# Altium PCB TNY276PN_5V_800mA_SMPS.PcbDoc
Units mil, origin at the board's own origin, x right, y up, seen from the top; angles counter-clockwise.
Board outline 2400 x 1550 mil, 2 copper layers (Top Layer, Bottom Layer); 26 components, 17 nets, 68 pads, 0 vias.
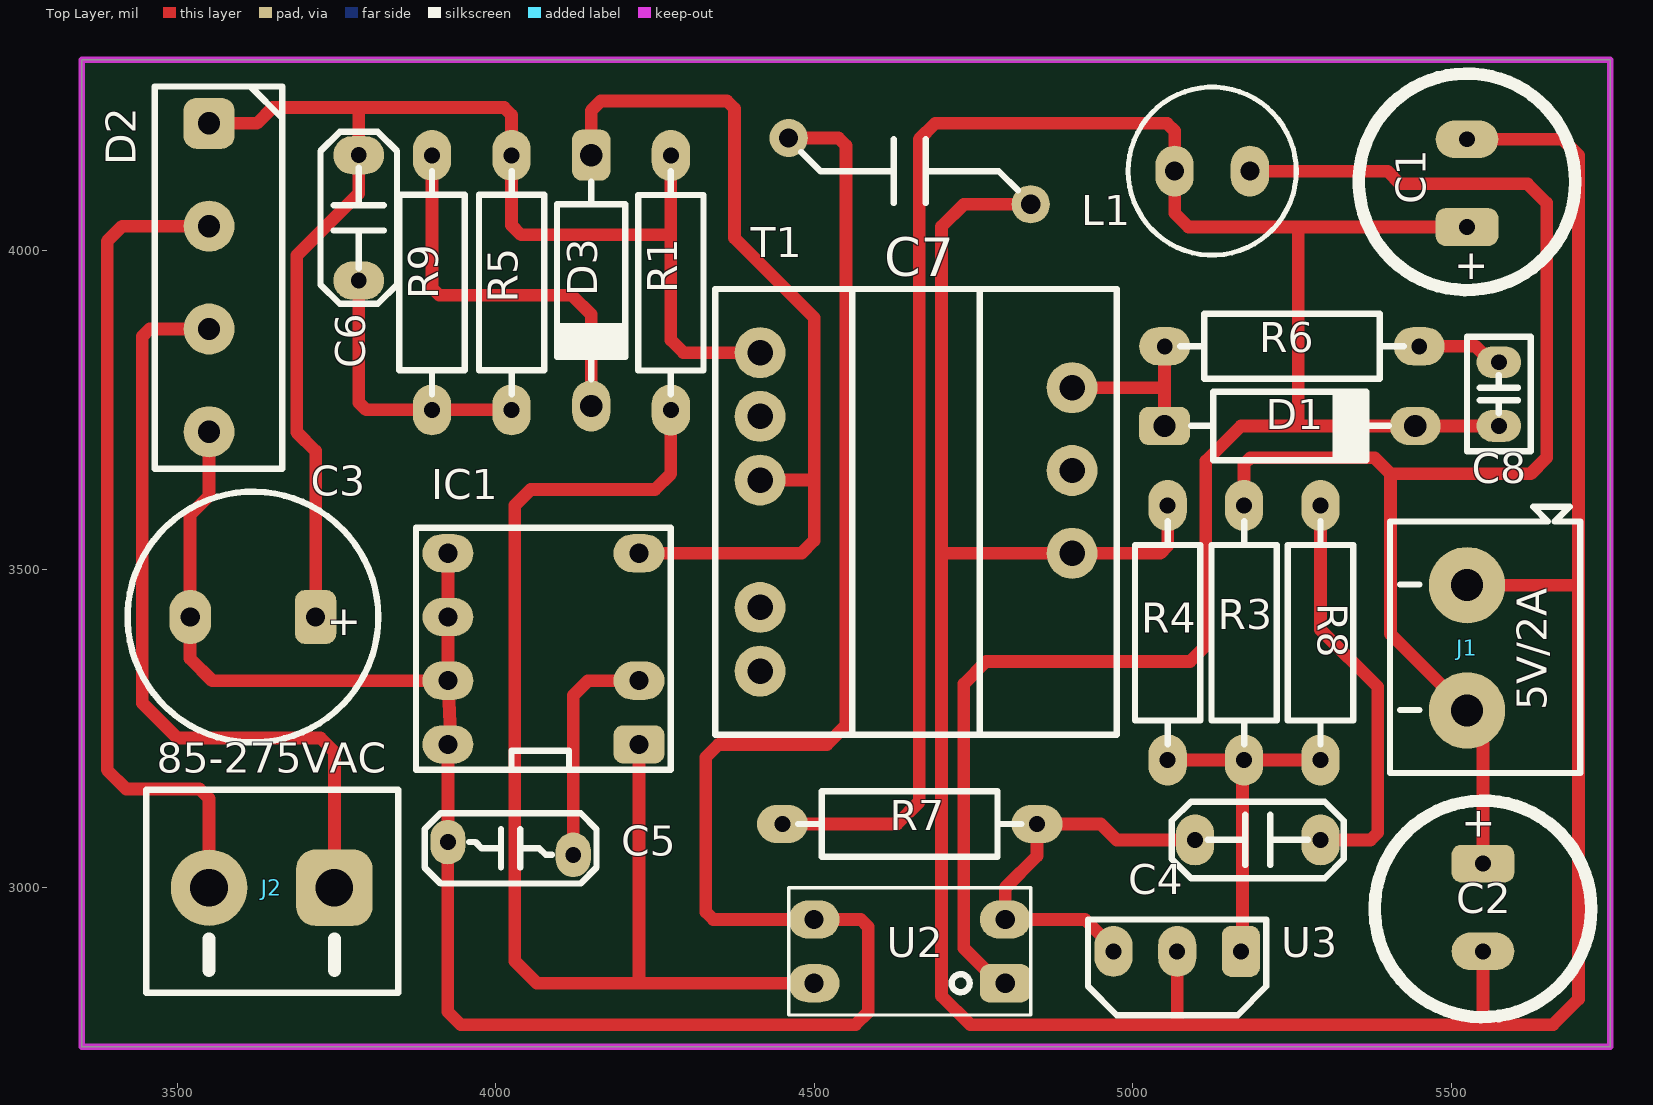
[diagram p0: Top Layer view]
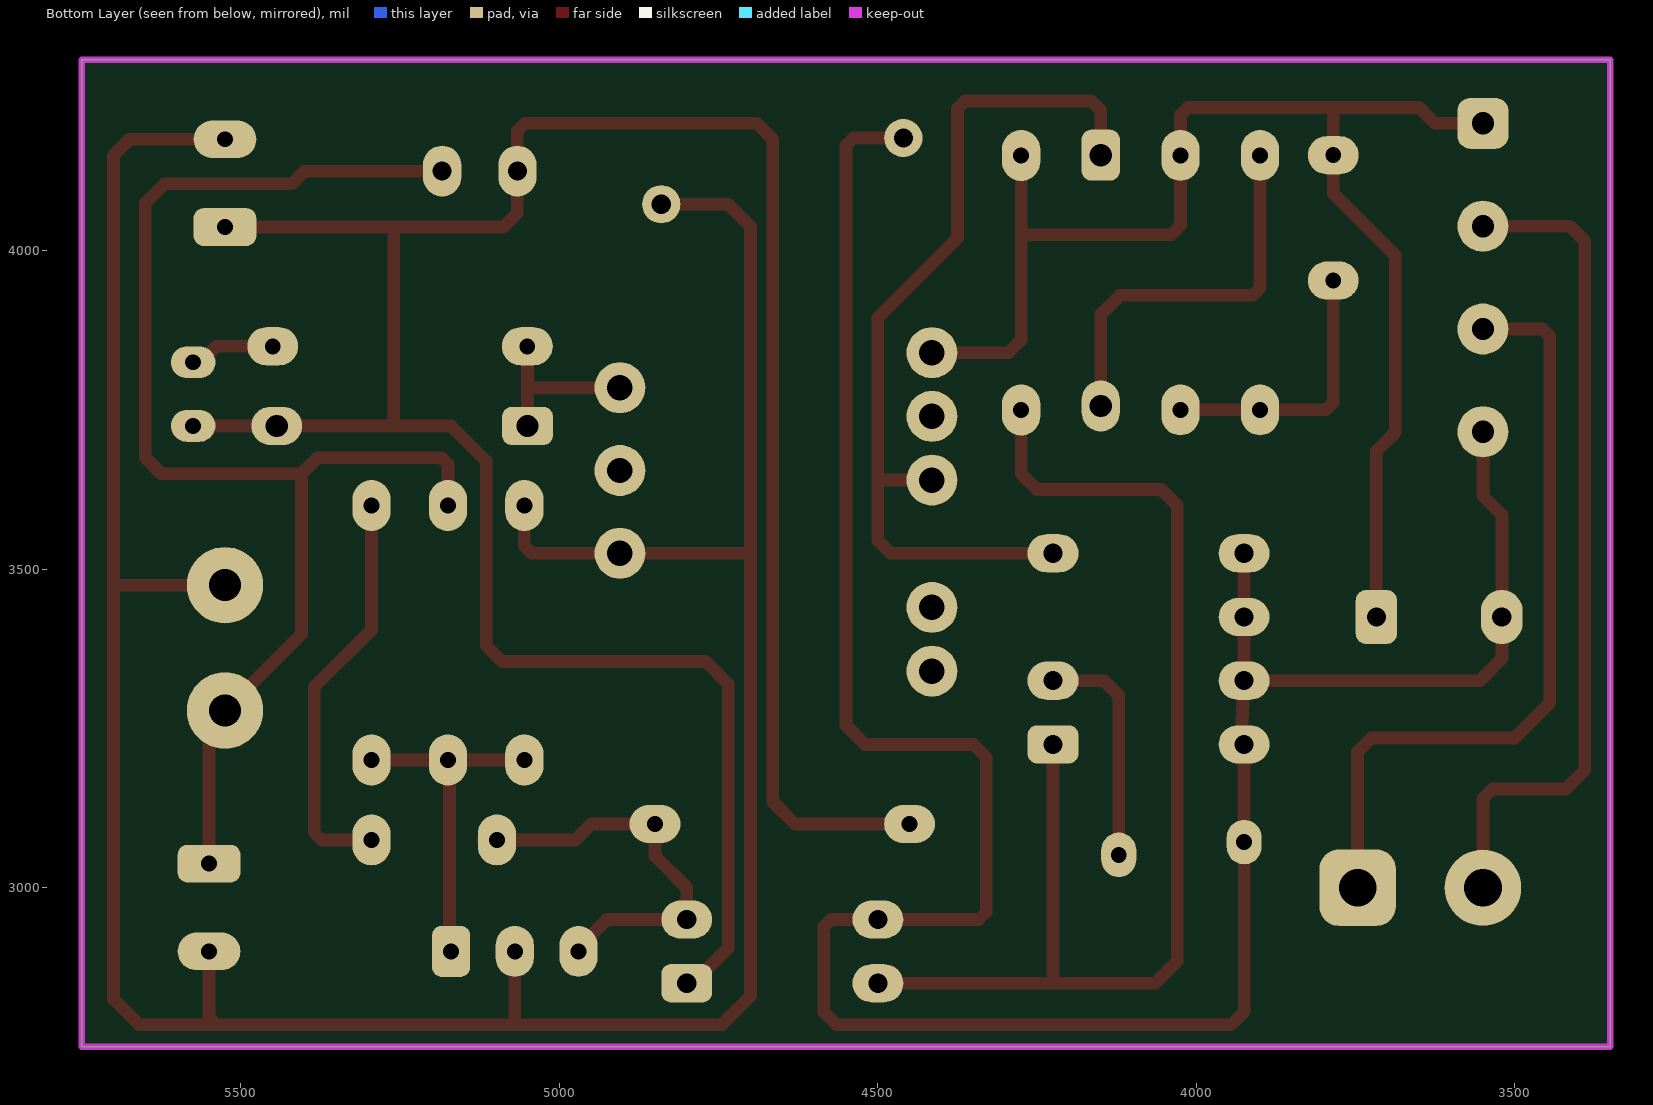
[diagram p1: Bottom Layer view, seen from below]
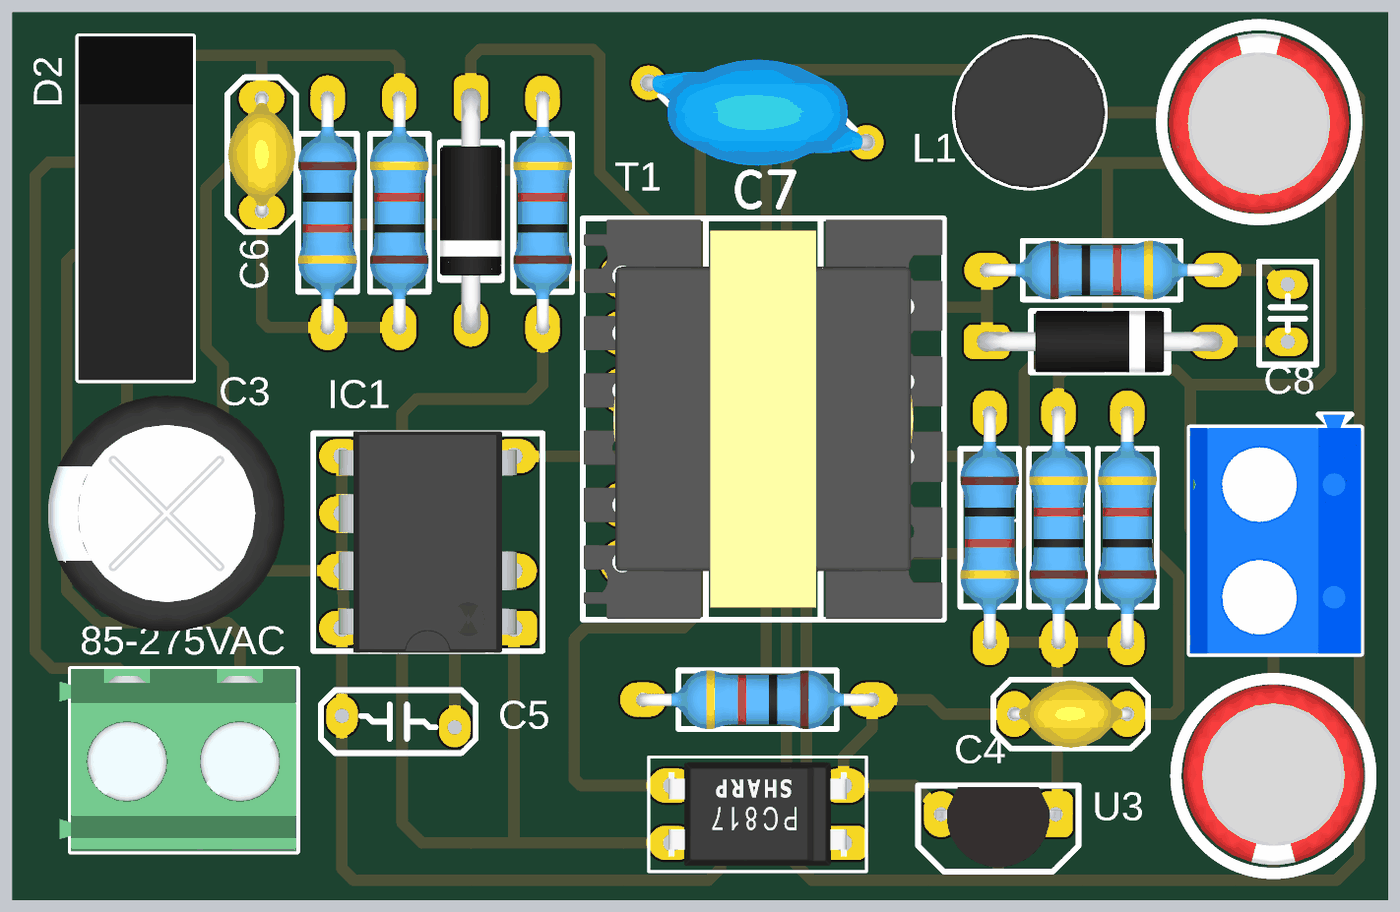
[diagram p2: 3D render of the assembled board from above, using the file's embedded part models]

## Layer stack, top to bottom
Top Solder: solder mask 0.4, Solder Resist, Dk 3.5
Top Layer: signal copper 1.4
Dielectric 1: dielectric 12.6, FR-4, Dk 4.8
Bottom Layer: signal copper 1.4
Bottom Solder: solder mask 0.4, Solder Resist, Dk 3.5

## Board outline
3350,2750 3350,4300 5750,4300 5750,2750

## Design rules (kind name [scope] priority, off if disabled: settings)
Clearance [All] p1: gap=10 ignorepadtopadclearanceinfootprint=FALSE except(0: Arc-Hole Track-Hole SMDPad-Hole THPad-Hole Via-Hole Fill-Hole Poly-Hole Region-Hole Text-Hole)
PolygonConnect [All] p1: connectstyle=Relief reliefconductorwidth=10 reliefentries=4 polygonreliefangle="90 Angle" airgapwidth=10
RoutingVias [All] p1: holewidth=28 width=50 viastyle="Through Hole" minholewidth=28 minwidth=50 maxholewidth=28 maxwidth=50
SolderMaskExpansion [All] p1: expansion=4 istentingtop=FALSE
Width [All] p1: maxlimit=30 minlimit=10 preferedwidth=20
30 further rules are at their usual default settings.

## Components (designator, comment, footprint, x,y, rotation, side; value= is the part's Value field where it differs from the comment)
C1 "1000uF/16V" CAP_RAD_3.5mm 5525,4108.27 r90 top
C2 "1000uF/16V" CAP_RAD_3.5mm 5550,2966.73 r270 top
C3 "10uF" CAP_RAD_D10x12.5_POL_BK 3618.9,3425 r180 top
C4 "104" CAP_DISC_4x3_YL 5196.56,3075 r180 top
C5 "104" CAP_DISC_104 4023.35,3061.65 r0 top
C6 "471/1kV" CAP_DISC_4x3_YL 3785,4051.56 r90 top
C7 "104" CAP_DISC_Y2222 4650,4125 r0 top
C8 "104" CAP_Ceramic_Disc_2 5575,3775 r270 top
D1 "1N5148" DO-41 5246.85,3725 r0 top
D2 "KBP206" DIODE-KBP206 3550,3957.87 r270 top
D3 "1N4007" DO-41 4150,3953.15 r270 top
IC1 "TNY-276PN" TNY-276PN-DIP-8C 4075,3375 r180 top
J1 "5V/2A" DG306-5.0-02P-12-00AH 5525,3376.57 r270 top
J2 "85-275VAC" DG127-5.0-02P-14-00AH 3746.85,3000 r180 top
L1 "470uH" RLB0812_vertical 5125,4125 r0 top
R1 "2M" RES-0.25W-H-MF 4275,3949.8 r90 top
R3 "4K7" RES-0.25W-H-MF 5175.01,3400.2 r90 top
R4 "4K7" RES-0.25W-H-MF 5055,3400.2 r270 top
R5 "100K" RES-0.25W-H-MF 4025,3950 r90 top
R6 "100R" RES-0.25W-H-MF 5250.2,3849.99 r0 top
R7 "120" RES-0.25W-H-MF 4650,3100 r180 top
R8 "1K" RES-0.25W-H-MF 5295,3400.2 r90 top
R9 "100R" RES-0.25W-H-MF 3900,3950 r270 top
T1 "EE16A" TRANSFORMER-EE16A 4660,3590 r0 top
U2 "PC817" DIP4 4650,2900 r180 top
U3 "TL431" TO-92 5070,2900 r180 top

## Footprints (in the part's own frame and the unit in brackets; to place one, negate y for a bottom-side part, rotate by r counter-clockwise, add the part's x,y. Pads: shape width x height; smd on the part's side, far side on the other; paste and mask are expansions set on the pad)
CAP_Ceramic_Disc_2 [mil]
  oval 50x70 hole 25: 1(-50,0) 2(50,0)
  silkscreen extent -90,-50 90,50, body extent -92,-49 92,49, height 289
CAP_DISC_4x3_YL [mil]
  oval 60x80 hole 25: 1(-98.44,0) 2(98.44,0)
  silkscreen extent -135,-60 135,60, body extent -107,-59 107,59, height 215
CAP_DISC_104 [mil]
  oval 55x70 hole 25: 1(-98.43,10) 2(98.43,-10)
  silkscreen extent -135,-55 135,55, body extent -118,-40 118,39, height 318
CAP_DISC_Y2222 [mil]
  round 60 hole 30: 1(-190,52) 2(190,-52)
  silkscreen extent -170,-50 170,50, body extent -202,-93 202,93, height 354
CAP_RAD_3.5mm [mm]
  rrect50% 1.5x2.5 hole 0.635: 1(-1.805,0)
  oval 1.5x2.5 hole 0.635: 2(1.695,0)
  silkscreen extent -4.32,-4.32 4.32,4.31, body extent -4.06,-4 3.94,4, height 11.33
CAP_RAD_D10x12.5_POL_BK [mil]
  rrect50% 65x85 hole 30: 1(-98.43,0)
  oval 65x85 hole 30: 2(98.43,0)
  silkscreen extent -197,-197 197,197, body extent -207,-207 207,207, height 551
DG127-5.0-02P-14-00AH [mil]
  rrect50% 120x120 hole 59.06: 1(0,0)
  round 120 hole 59.06: 2(196.85,0)
  silkscreen extent -100,-154 295,165, body extent -98,-154 315,165, height 398
DG306-5.0-02P-12-00AH [mil] "• Current rating: 10 A AC/DC  • Voltage rating: 300 V AC/DC  • Temperature range: -30° ~ +120°  • Applicable wire: 22-14AWG UL (0.5 - 1.5mm² IEC)"
  round 120 hole 50: 1(-98.43,0) 2(98.43,0)
  silkscreen extent -221,-121 197,178, body extent -221,-121 196,178, height 394
DIODE-KBP206 [mil]
  rrect50% 80x80 hole 35: 1(-242.13,0)
  round 80 hole 35: 2(-80.71,0) 3(80.71,0) 4(242.13,0)
  silkscreen extent -300,-85 300,115, body extent -300,-85 300,115, height 530
DIP4 [mil]
  rrect50% 80x60 hole 30: 1(-150,50)
  oval 80x60 hole 30: 2(-150,-50) 3(150,-50) 4(150,50)
  silkscreen extent -190,-100 190,100, body extent -155,-90 155,90, height 169
DO-41 [mil]
  rrect50% 80x60 hole 35: 1(-196.85,0)
  oval 80x60 hole 35: 2(196.85,0)
  silkscreen extent -155,-54 155,54, body extent -214,-54 214,54, height 132
RES-0.25W-H-MF [mil]
  oval 80x60 hole 25: 1(-199.8,0) 2(199.8,0.01)
  silkscreen extent -175,-51 175,51, body extent -211,-51 211,51, height 106
RLB0812_vertical [mil]
  oval 60x80 hole 30 mask+2.76: 1(-59.06,0) 2(59.06,0)
  silkscreen extent -132,-132 132,132, body extent -132,-132 132,132, height 394
TNY-276PN-DIP-8C [mil]
  rrect50% 80x60 hole 30: 1(-150,150)
  oval 80x60 hole 30: 2(-150,50) 4(-150,-150) 5(150,150) 5(150,-50) 5(150,50) 5(150,-150)
  silkscreen extent -200,-190 200,190, body extent -155,-194 156,194, height 162
TO-92 [mil]
  rrect50% 60x80 hole 25: 1(-100,0)
  oval 60x80 hole 25: 2(0,0) 3(100,0)
  silkscreen extent -140,-50 140,100, body extent -109,-48 109,93, height 298
TRANSFORMER-EE16A [mil]
  round 80 hole 40: 1(-245,250) 2(-245,150) 3(-245,50) 4(-245,-150) 5(-245,-250) 6(245,-65) 7(245,65) 8(245,195)
  silkscreen extent -315,-350 315,350, body extent -313,-348 313,348, height 707

## Part data
C1 C2 C3: library part Capacitor(Radian)
C4 C5 C6 C7 C8: library part Capacitors(Disc)
D1 D3: library part Diode-1N4007
D2: library part Diode-KBP206
IC1: library part SMPS-TNY276PN, "TinySwitch-III Family"
J1: library part DG306-5.0-02P-12-00AH
J2: library part DG127-5.0-02P-14-00AH
L1: library part Inductors
R1 R3 R4 R5 R6 R7 R8 R9: library part "Resistors THD"
T1: library part TRANS-EE16A-ATX-VERTICAL

## Nets (pads, with @x,y where several pads share a name; then routed paths per layer and width w, separated by ;. In a path a pad name is that pad's centre, name@x,y a point inside that pad or via, vN(x,y) a via of type N, cw(c..) or ccw(c..) an arc to the next point about the centre after c; other vN are vias at no path point)
GND: C1.2 C2.2 C7.2 J1.1 R4.1 T1.6 U3.2 | length 4743.1
  Top Layer w20: C7.2 4735,4073 4700,4038 4700,3525 ; R4.1 5055,3536.72 5043.28,3525 4700,3525 ; U3.2 5070,2790 5065,2785 ; J1.1 5700,3475 ; C1.2 5675,4175 5700,4150 5700,3475 ; C2.2 5550,2796.72 5538.28,2785 ; 4700,3525 4700,2830 4745,2785 5065,2785 ; 5065,2785 5538.28,2785 ; 5538.28,2785 5660,2785 5700,2825 5700,3475
NetC1_1: C1.1 C8.2 D1.2 L1.1 R7.2 U2.1 | length 4271.3
  Top Layer w20: R7.2 4629.99,3099.99 4665,3135 4665,4175 4690,4200 5054.23,4200 5065.94,4188.28 L1.1 ; U2.1 4790,2850 4735,2905 4735,3320 4770,3355 5090,3355 5115,3380 5115,3670 5170,3725 5260,3725 ; L1.1@5065.94,4134.06 5065.94,4059.06 5087.8,4037.2 5260,4037.2 ; D1.2@5436.85,3725 5260,3725 ; D1.2@5450,3725 C8.2 ; C1.1 5260,4037.2 ; 5260,3725 5260,4037.2
NetC2_1: C2.1 J1.2 L1.2 R3.2 | length 2154.3
  Top Layer w20: R3.2 5175,3665 5185,3675 5380,3675 5405,3650 ; L1.2 5400,4125 5420,4105 5620,4105 5650,4075 5650,3675 5625,3650 5405,3650 ; C2.1@5547.2,3035 C2.1 5550,3226.09 5544.13,3231.96 5544.13,3267.28 5555,3278.15 J1.2 5405,3398.15 5405,3650
NetC3_1: C3.1 C6.2 D2.1 R1.2 R5.2 T1.1 | length 2220.2
  Top Layer w20: D2.1 3625,4200 3650,4225 3785,4225 ; C3.1 3717.32,3685.47 3687.8,3715 3687.8,3992.8 3785,4090 C6.2 3785,4225 ; R1.2@4275.39,4150 R1.2 4274.99,4025 ; T1.1@4415,3826.22 T1.1@4424.53,3826.22 ; T1.1 4295,3840 4274.99,3860.01 4274.99,4025 ; 3785,4225 4013.28,4225 4025,4213.28 R5.2 4025,4040 4040,4025 4274.99,4025
NetC3_2: C3.2 C5.1 C7.1 D2.4 IC1.5 U2.3 | length 4076.3
  Top Layer w20: D2.4 3550,3615 3520,3585 3520,3360 3555,3325 IC1.5@3925,3325 ; C5.1@3924.92,3091.65 C5.1@3924.96,3091.61 ; IC1.5@3925,3225 3924.96,3224.96 C5.1@3924.96,3091.61 ; IC1.5@3925,3525 3925,3425 IC1.5@3925,3325 ; C5.1@3928.27,3088.3 C5.1@3924.96,3091.61 ; IC1.5@3930,3225 3929.99,3225.25 IC1.5@3925,3325 ; C7.1 4538.28,4177 4550,4165.28 4550,3255 4520,3225 4350,3225 4330,3205 4330,2961.72 4341.72,2950 U2.3 4573.28,2950 4585,2938.28 4585,2805 4565,2785 3945,2785 3924.92,2805.08 C5.1 3924.96,3071.69 C5.1@3924.96,3091.61
NetC4_1: C4.1 R8.2 | length 645.4
  Top Layer w20: C4.1 5373.28,3075 5385,3086.72 5385,3315 5294.99,3405.01 R8.2
NetC4_2: C4.2 R7.1 U2.2 U3.3 | length 644.9
  Top Layer w20: U3.3 4970,2905.15 4925.15,2950 U2.2 4800,3000 4849.8,3049.8 R7.1 4950,3100 4975,3075 C4.2@5120,3075
NetC5_2: C5.2 IC1.2 | length 363
  Top Layer w20: C5.2 4121.77,3301.77 4145,3325 IC1.2
NetC6_1: C6.1 R5.1 R9.2 | length 436.1
  Top Layer w20: C6.1 3785,3761.91 3796.72,3750.2 R9.2 R5.1
NetC8_1: C8.1 R6.2 | length 135.4
  Top Layer w20: R6.2 5538.28,3850 5563.28,3825 C8.1
NetD1_1: D1.1 R6.1 T1.8 | length 271.4
  Top Layer w20: T1.8 5047.7,3785 5050.2,3787.5 ; D1.1 5050.2,3725.2 5050.2,3787.5 ; R6.1 5050.2,3849.8 5050.2,3787.5
NetD2_2: D2.2 J2.2 | length 1318.4
  Top Layer w20: J2.2 3550,3140 3535,3155 3420,3155 3390,3185 3390,4015 3413.58,4038.58 D2.2
NetD2_3: D2.3 J2.1 | length 1232.1
  Top Layer w20: D2.3 3456.72,3877.17 3445,3865.45 3445,3290 3500,3235 3725,3235 3746.85,3213.15 J2.1
NetD3_1: D3.1 IC1.4 T1.3 | length 1394.4
  Top Layer w20: D3.1@4150,4160 4150,4220 4165,4235 4363.28,4235 4375,4223.28 4375,4020 4500,3895 4500,3640 ; IC1.4 4480,3525 4500,3545 4500,3640 ; T1.3 4500,3640
NetD3_2: D3.2 R9.1 | length 619.1
  Top Layer w20: R9.1 3900,3941.72 3911.72,3930 4120,3930 4150,3900 D3.2
NetIC1_1: IC1.1 R1.1 U2.4 | length 1940.2
  Top Layer w20: IC1.1 4225,2850 ; R1.1 4275,3650 4250,3625 4055,3625 4030,3600 4030,2885 4065,2850 4225,2850 ; U2.4 4225,2850
NetR3_1: R3.1 R4.2 R8.1 U3.1 | length 522.5
  Top Layer w20: R4.2@5075.01,3200.39 R3.1 ; U3.1 5172.5,2902.5 5172.5,3197.89 R3.1 ; R8.1 R3.1
pads on no net: T1.2 T1.4 T1.5 T1.7

## Keep-outs
Keep-Out Layer:
  the board outline again, w10

## Text inside footprints (layer, text, board x,y; h text height)
C1: Top Overlay "+" at 5505,4010.67 h80 r180
C2: Top Overlay "+" at 5570,3064.33 h80
C3: Top Overlay "+" at 3788.9,3452.4 h80 r180